# Altium PCB SXLP-450+.PcbDoc
Units mm, origin at the board's own origin, x right, y up, seen from the top; angles counter-clockwise.
Board outline 25 x 25 mm, 2 copper layers (Top Layer, Bottom Layer); 1 components, 3 nets, 12 pads, 50 vias.
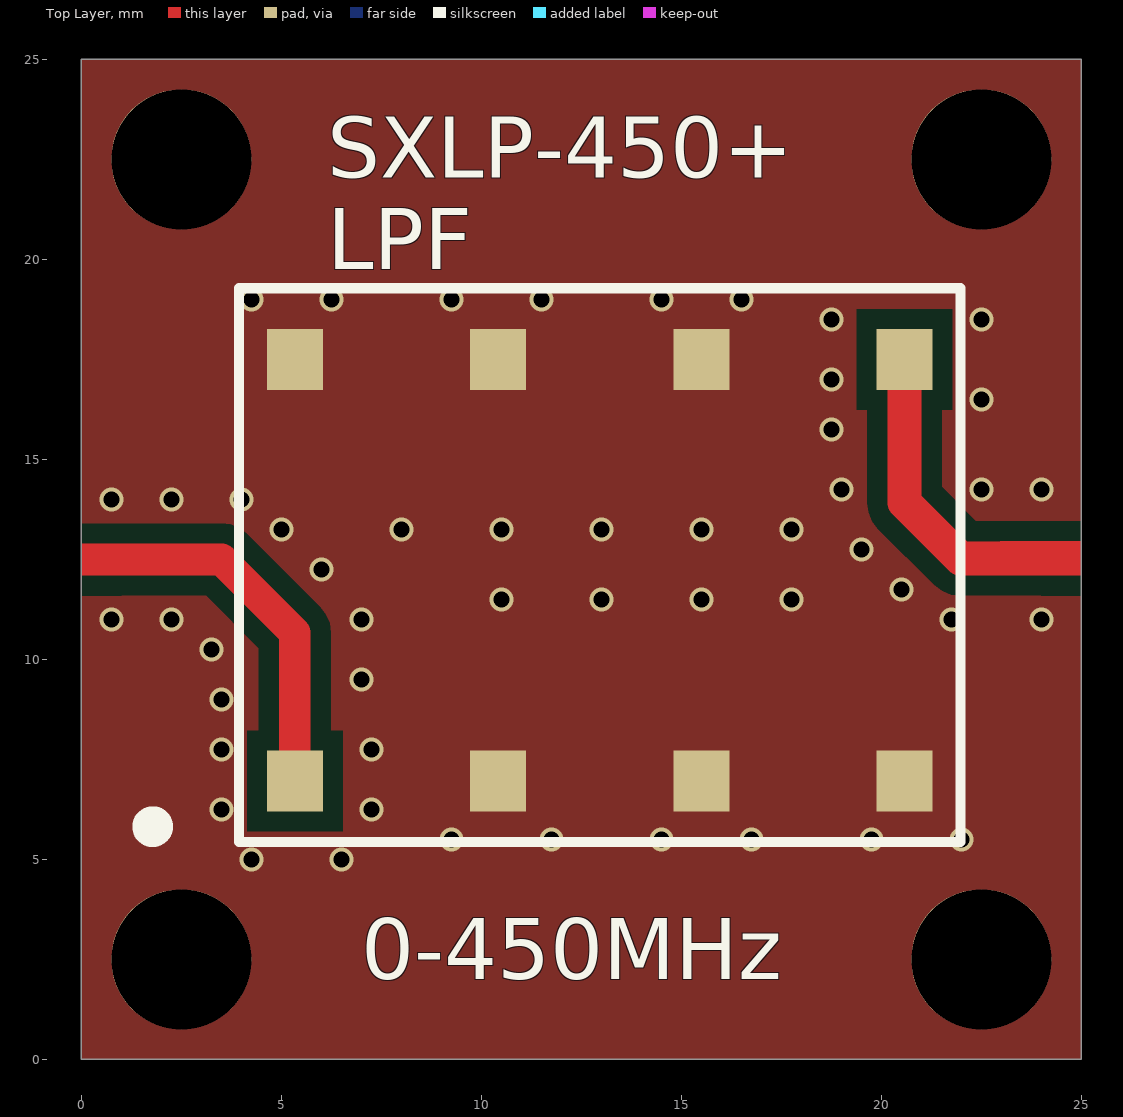
[diagram p0: Top Layer view]
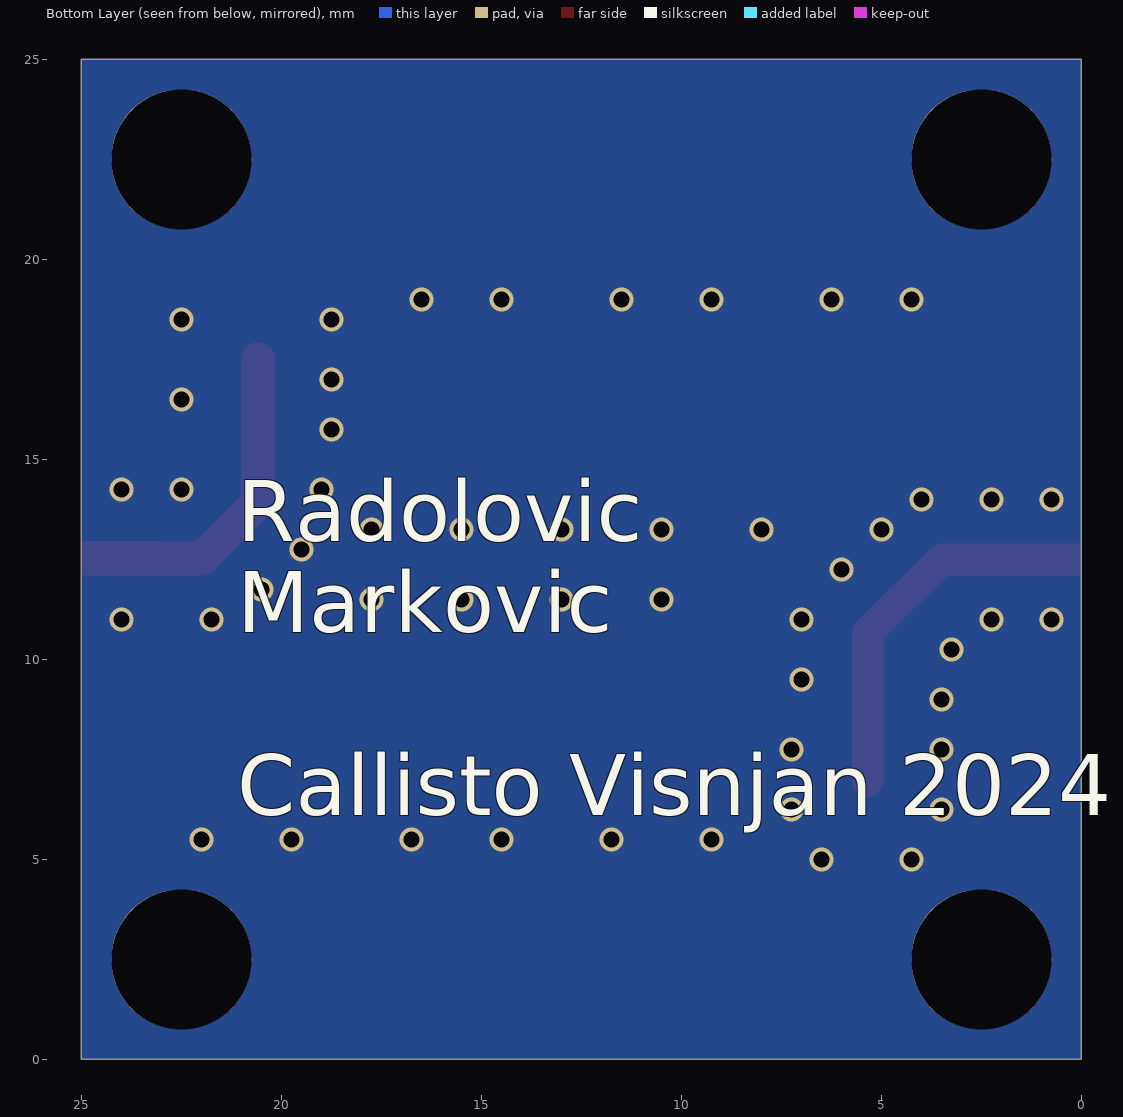
[diagram p1: Bottom Layer view, seen from below]

## Layer stack, top to bottom
Top Solder: solder mask 0.0102, Solder Resist, Dk 3.5
Top Layer: signal copper 0.0356
Dielectric 1: dielectric 0.32, FR-4, Dk 4.8
Bottom Layer: signal copper 0.0356
Bottom Solder: solder mask 0.0102, Solder Resist, Dk 3.5

## Board outline
0,0 25,0 25,25 0,25

## Design rules (kind name [scope] priority, off if disabled: settings)
Clearance [All] p1: gap=0.254 ignorepadtopadclearanceinfootprint=FALSE except(0: Arc-Hole Track-Hole SMDPad-Hole THPad-Hole Via-Hole Fill-Hole Poly-Hole Region-Hole Text-Hole; 0.508: Arc-Fill Arc-Poly Arc-Region Track-Fill Track-Poly Track-Region SMDPad-Poly Poly-Region)
HoleSize [All] p1: absolutevalues=TRUE maxlimit=2.54 minlimit=0.3 maxpercent=80.000 minpercent=20.000
PolygonConnect [All] p1: connectstyle=Direct reliefconductorwidth=0.254 reliefentries=4 polygonreliefangle="90 Angle" airgapwidth=0.254
RoutingVias [All] p1: holewidth=0.711 width=1.27 viastyle="Through Hole" minholewidth=0.711 minwidth=1.27 maxholewidth=0.711 maxwidth=1.27
SolderMaskExpansion [All] p1: expansion=0.102 istentingtop=FALSE
Width [All] p1: maxlimit=2 minlimit=0.254 preferedwidth=0.254
29 further rules are at their usual default settings.

## Components (designator, comment, footprint, x,y, rotation, side; value= is the part's Value field where it differs from the comment)
LPF1 "=Value" SXLP-450+ 5.34,6.959 r90 top

## Footprints (in the part's own frame and the unit in brackets; to place one, negate y for a bottom-side part, rotate by r counter-clockwise, add the part's x,y. Pads: shape width x height; smd on the part's side, far side on the other; paste and mask are expansions set on the pad)
SXLP-450+ [mil]
  rect 60x55 smd: 1(0,0) 2(0,-200) 3(0,-400) 4(0,-600) 5(415,-600) 6(415,-400) 7(415,-200) 8(415,0)
  silkscreen extent -60,-655 485,145

## Part data
LPF1: library part SXLP-450+, "SXLP-450+, Low Pass Filter, Mini Circuits, DC to 450 MHz"

## Free pads (board coordinates)
  round 3.5 hole 3.5: 3(2.5,2.5) 3(2.5,22.5) 3(22.5,2.5) 3(22.5,22.5)

## Via types
v1: diameter 0.6, hole 0.4, Top Layer to Bottom Layer, 50 vias

## Nets (pads, with @x,y where several pads share a name; then routed paths per layer and width w, separated by ;. In a path a pad name is that pad's centre, name@x,y a point inside that pad or via, vN(x,y) a via of type N, cw(c..) or ccw(c..) an arc to the next point about the centre after c; other vN are vias at no path point)
GND: LPF1.2 LPF1.3 LPF1.4 LPF1.6 LPF1.7 LPF1.8 pad.3
  other v1: 4.25,5 6.5,5 9.25,5.5 11.75,5.5 14.5,5.5 16.75,5.5 19.75,5.5 22,5.5 3.5,6.25 7.25,6.25 3.5,7.75 7.25,7.75 3.5,9 7,9.5 3.25,10.25 0.75,11 2.25,11 7,11 21.75,11 24,11 10.5,11.5 13,11.5 15.5,11.5 17.75,11.5 20.5,11.75 6,12.25 19.5,12.75 5,13.25 8,13.25 10.5,13.25 13,13.25 15.5,13.25 17.75,13.25 0.75,14 2.25,14 4,14 19,14.25 22.5,14.25 24,14.25 18.75,15.75 22.5,16.5 18.75,17 18.75,18.5 22.5,18.5 4.25,19 6.25,19 9.25,19 11.5,19 14.5,19 16.5,19
IN/OUT: LPF1.1 | length 7.3
  Top Layer w0.79: 2.5,12.5 2.505,12.495 3.505,12.495 5.34,10.66 LPF1.1
OUT/IN: LPF1.5 | length 6.6
  Top Layer w0.848: LPF1.5 20.58,13.92 21.976,12.524 22.976,12.524

## Polygon pours and split planes (outlines as drawn)
GND on Bottom Layer "GND_L02_P002" (solid, pour order 2): 0,25 25,25 25,0 0,0
GND on Top Layer "GND_L01_P000" (solid, pour order 0): 0,0 0,25 25,25 25,0

## Other copper
Top Layer:
  region net OUT/IN: 22.976,12.948 25,12.948 25,12.1 22.976,12.1
  region net IN/OUT: 0,12.89 3,12.89 3,12.1 0,12.1

## Silkscreen, mask and mechanical layers (free items; w line width, h text height)
Top Overlay:
  text "SXLP-450+ / LPF" at 6.144,19.75 h1.52
  text "0-450MHz" at 7.004,2.004 h1.52
Bottom Overlay:
  text "Radolovic / Markovic /  / Callisto Visnjan 2024" at 21.1,6.1 h1.52
Mechanical 1:
  the board outline again, w0.254
Dimensions:
  text "JLCPcb Calculator - 31.1 mil trace width, 20 mil trace to plane - coplanar waveguide. 0.6mm board. Min via hole size 0.3 mm." at -5.5,33 h1.52

## Dimensions
25,0 to 25,25 on Dimensions
25,25 to 0,25 on Dimensions